# Altium PCB PCB1.PcbDoc
Units mm, origin at the board's own origin, x right, y up, seen from the top; angles counter-clockwise.
Board outline 70 x 70 mm, 4 copper layers (Top Layer, Internal Plane 1, Internal Plane 2, Bottom Layer), stack 0.462 mm thick; 11 components, 6 nets, 23 pads, 0 vias.
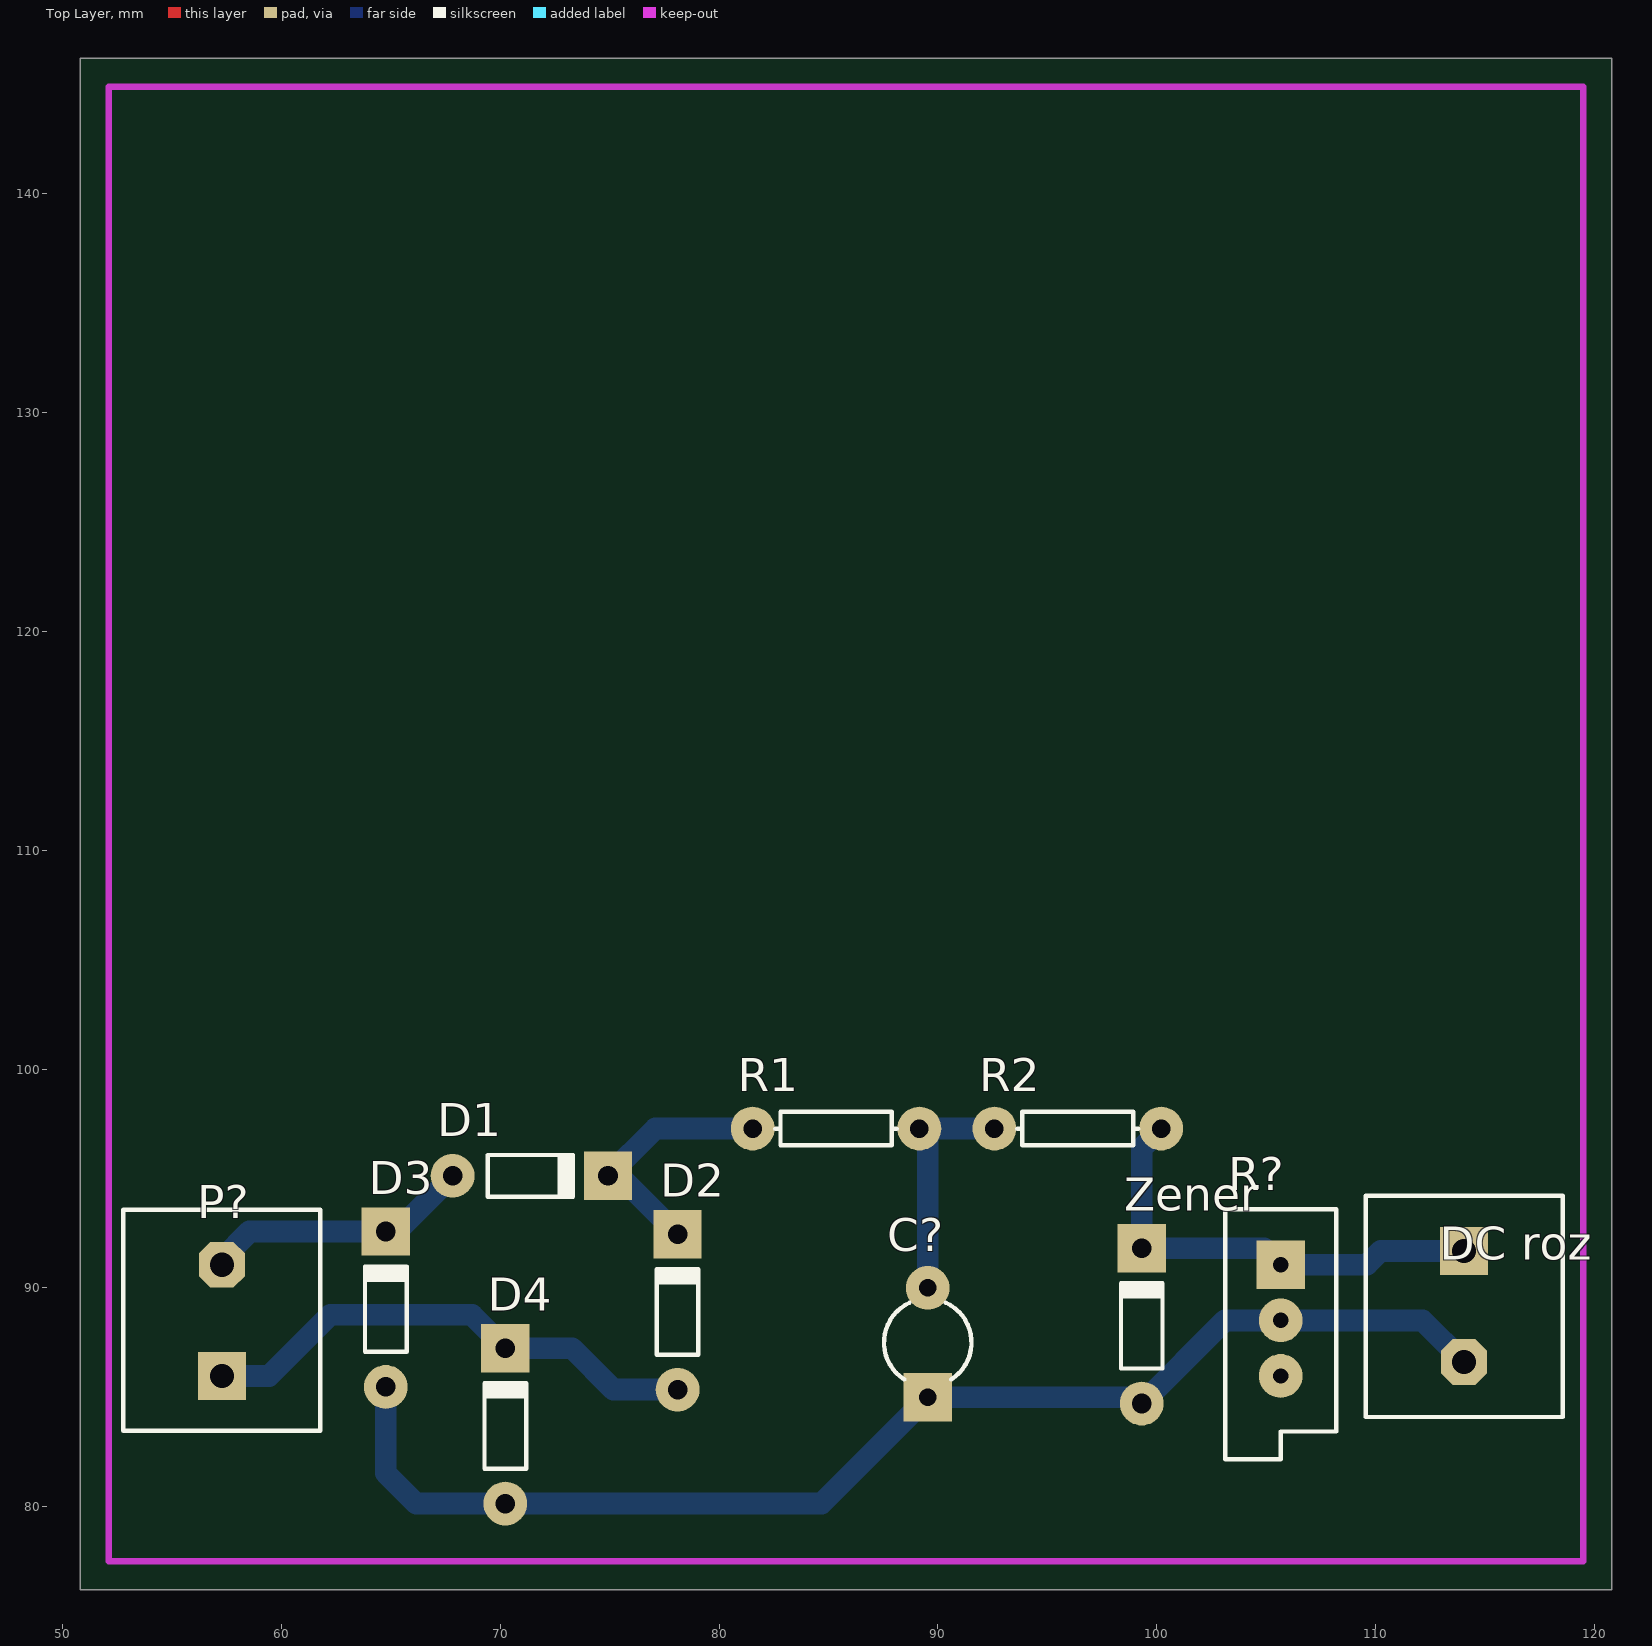
[diagram p0: Top Layer view]
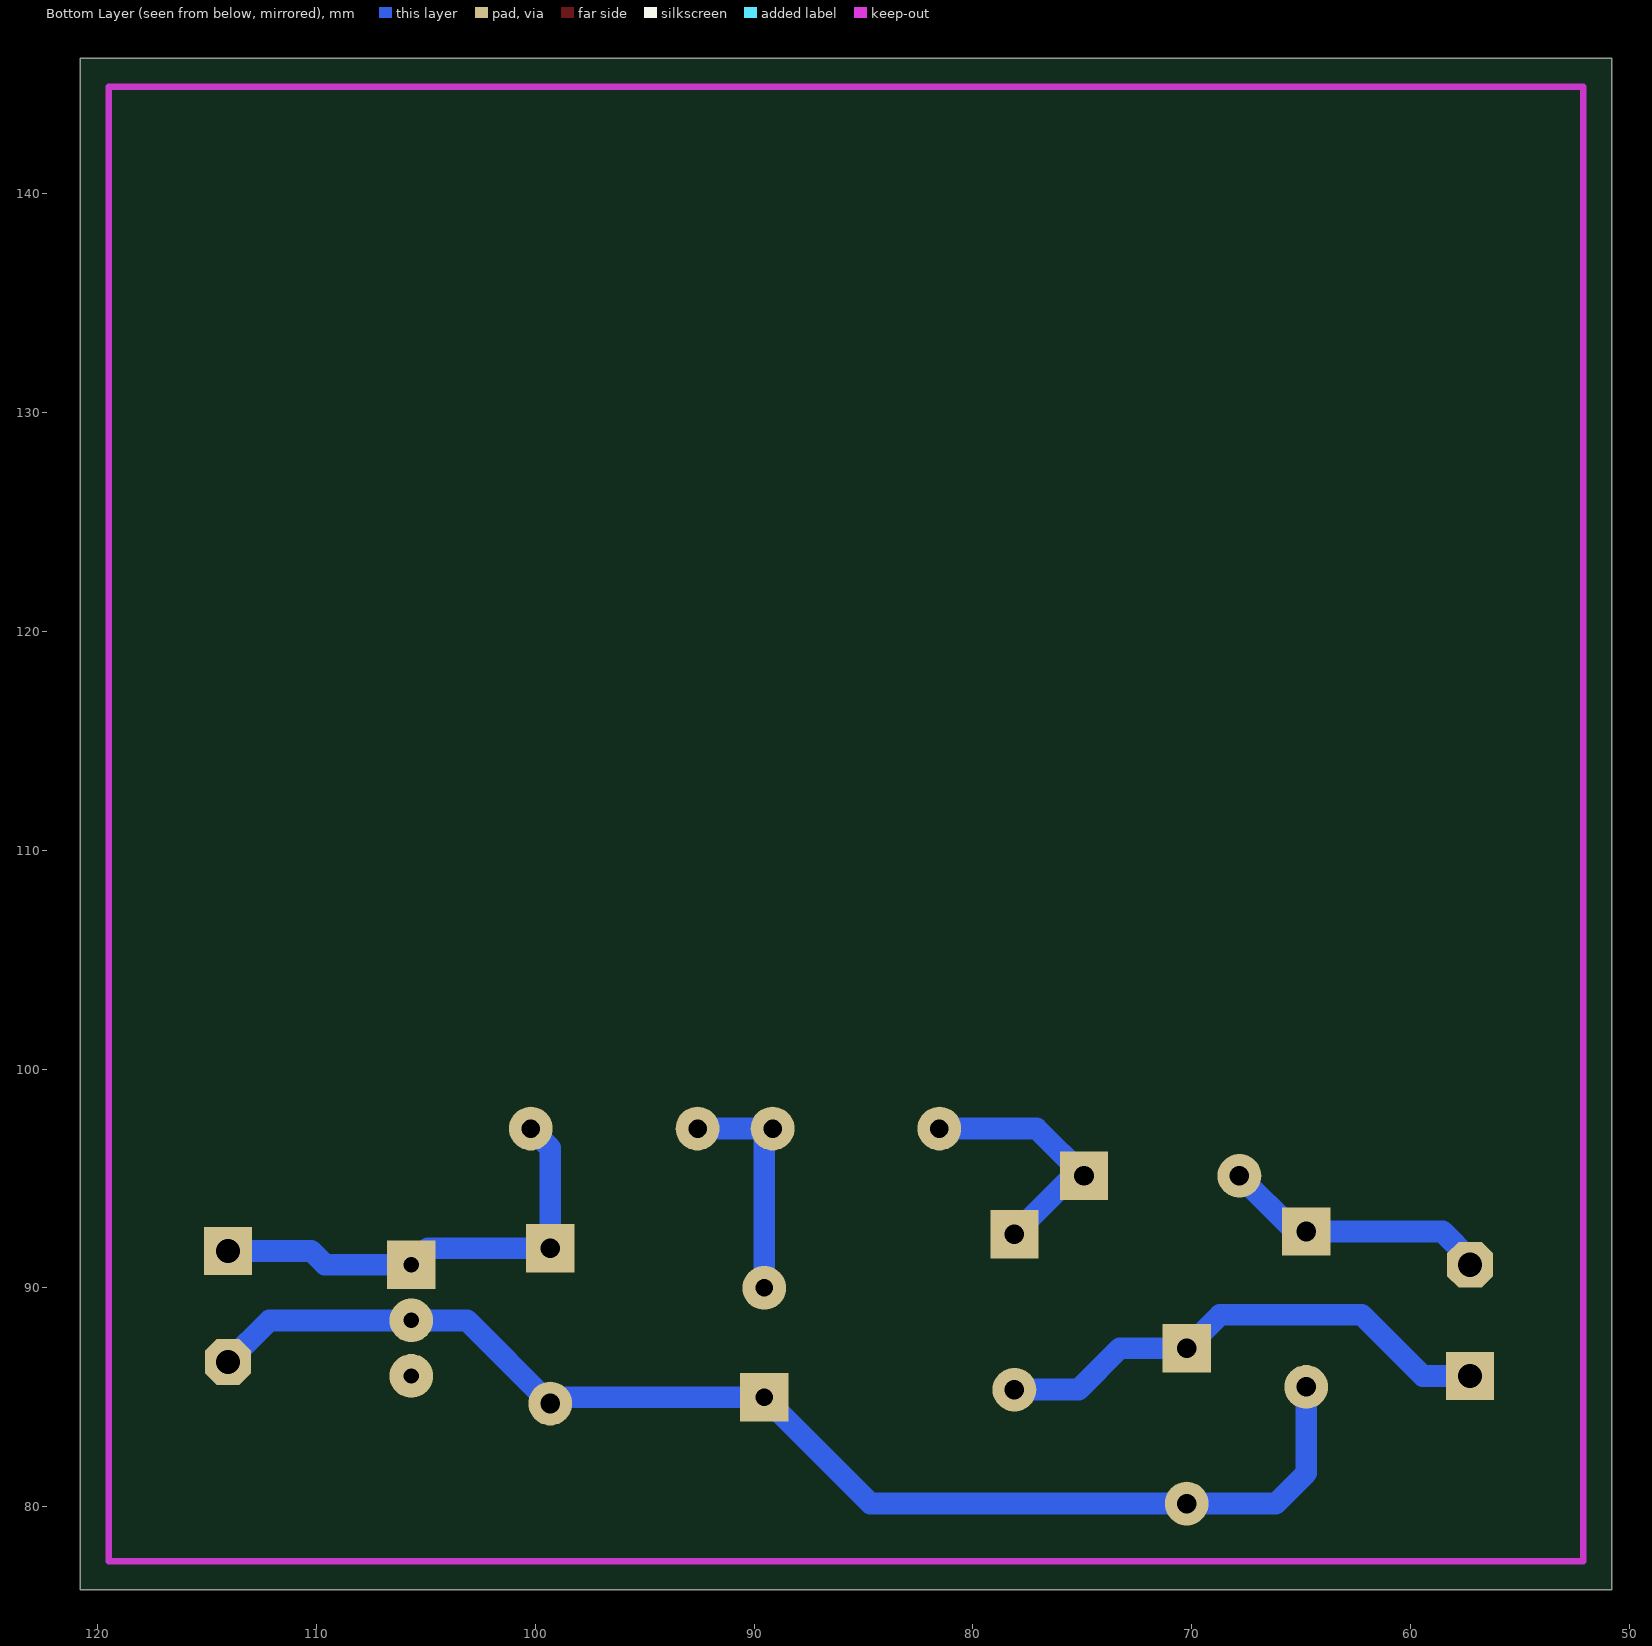
[diagram p1: Bottom Layer view, seen from below]
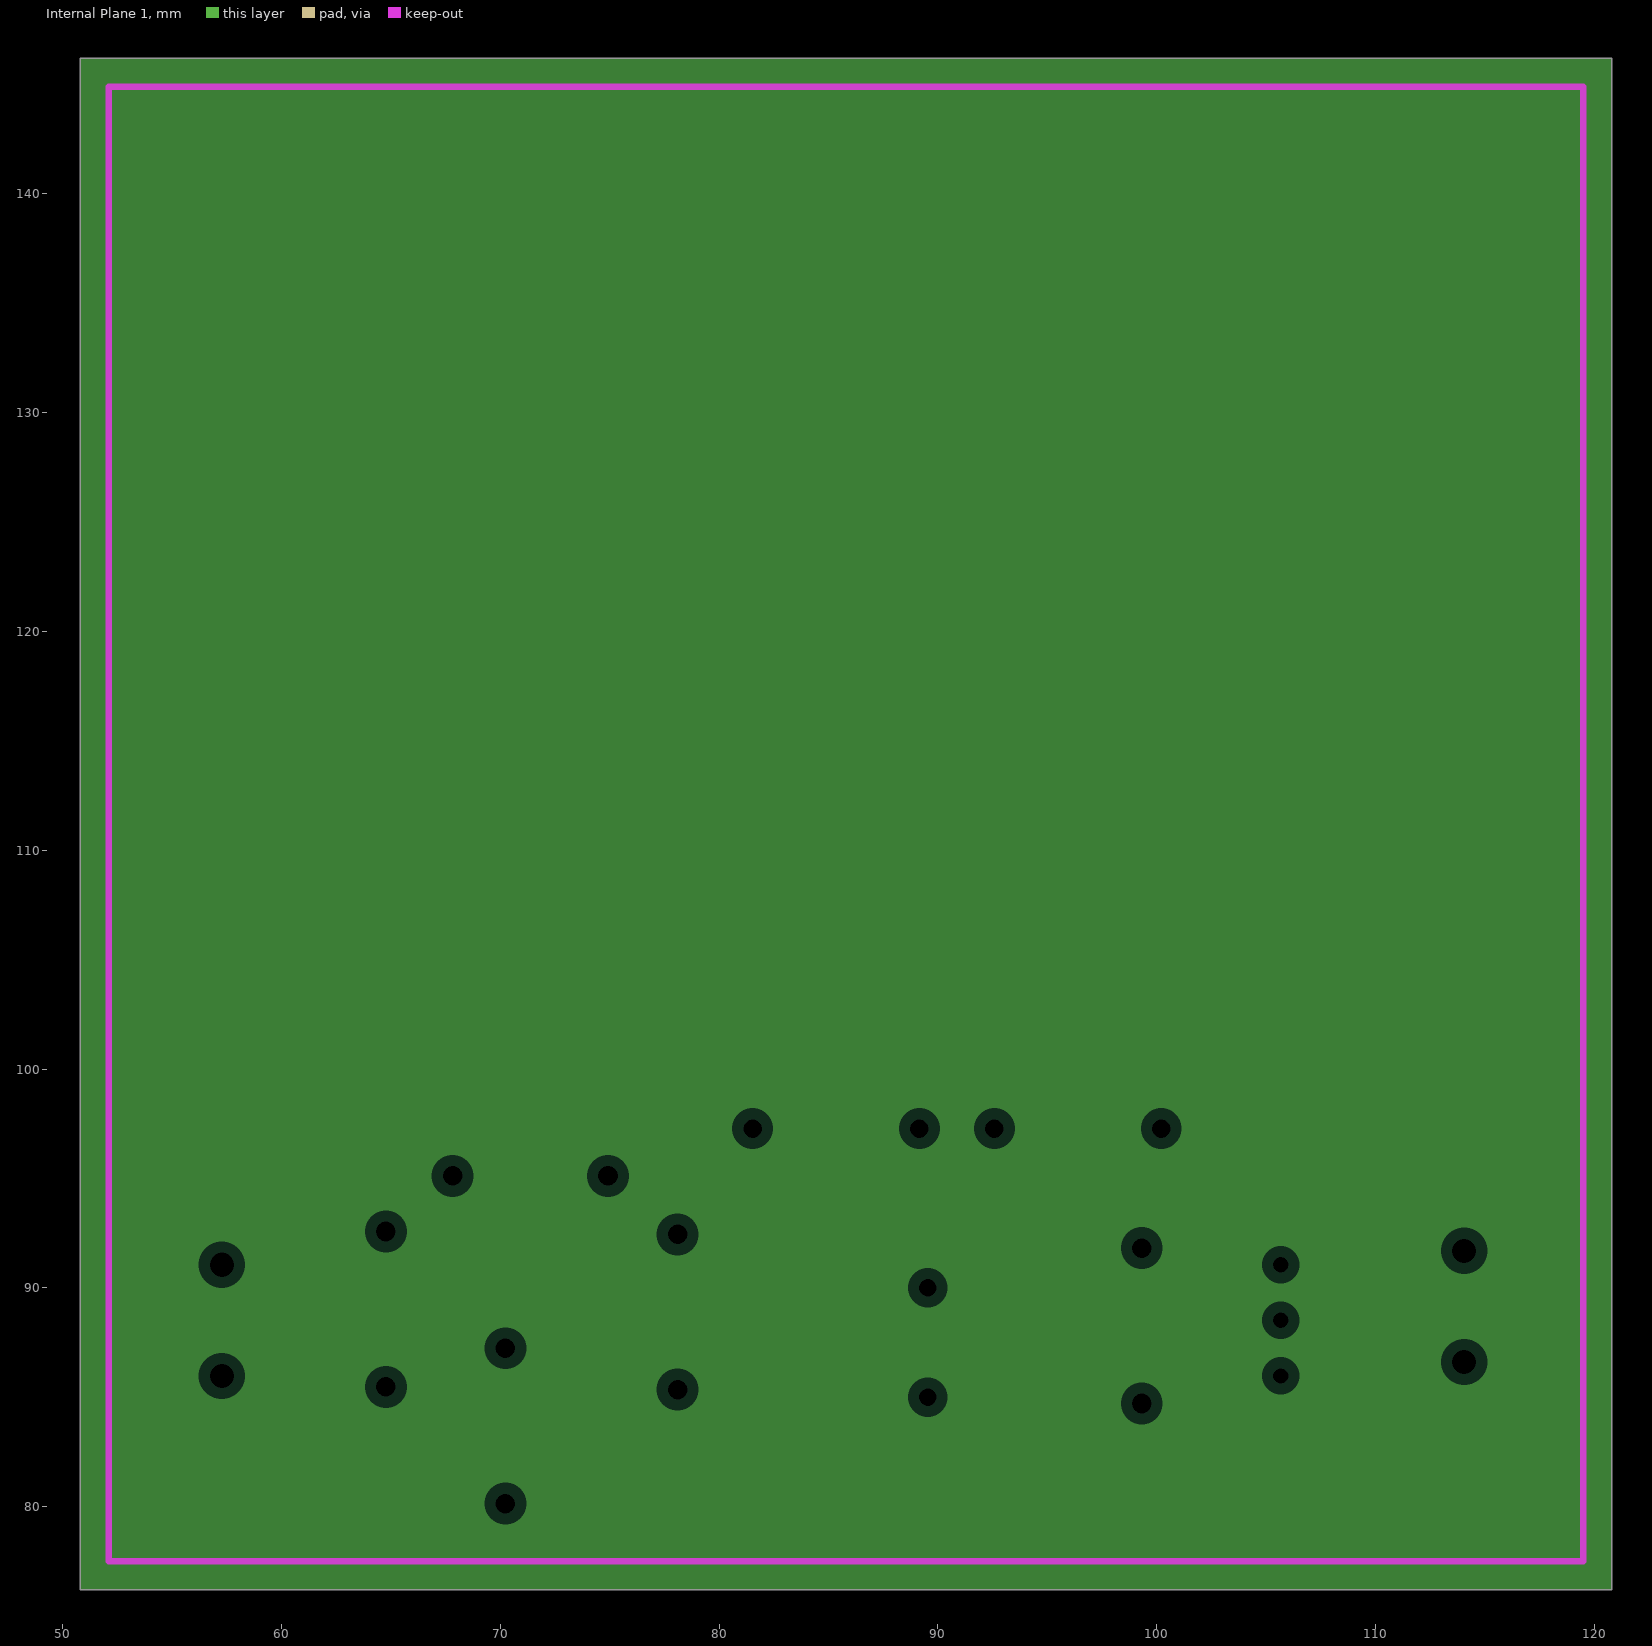
[diagram p2: Internal Plane 1, clearances drawn from the general rule]
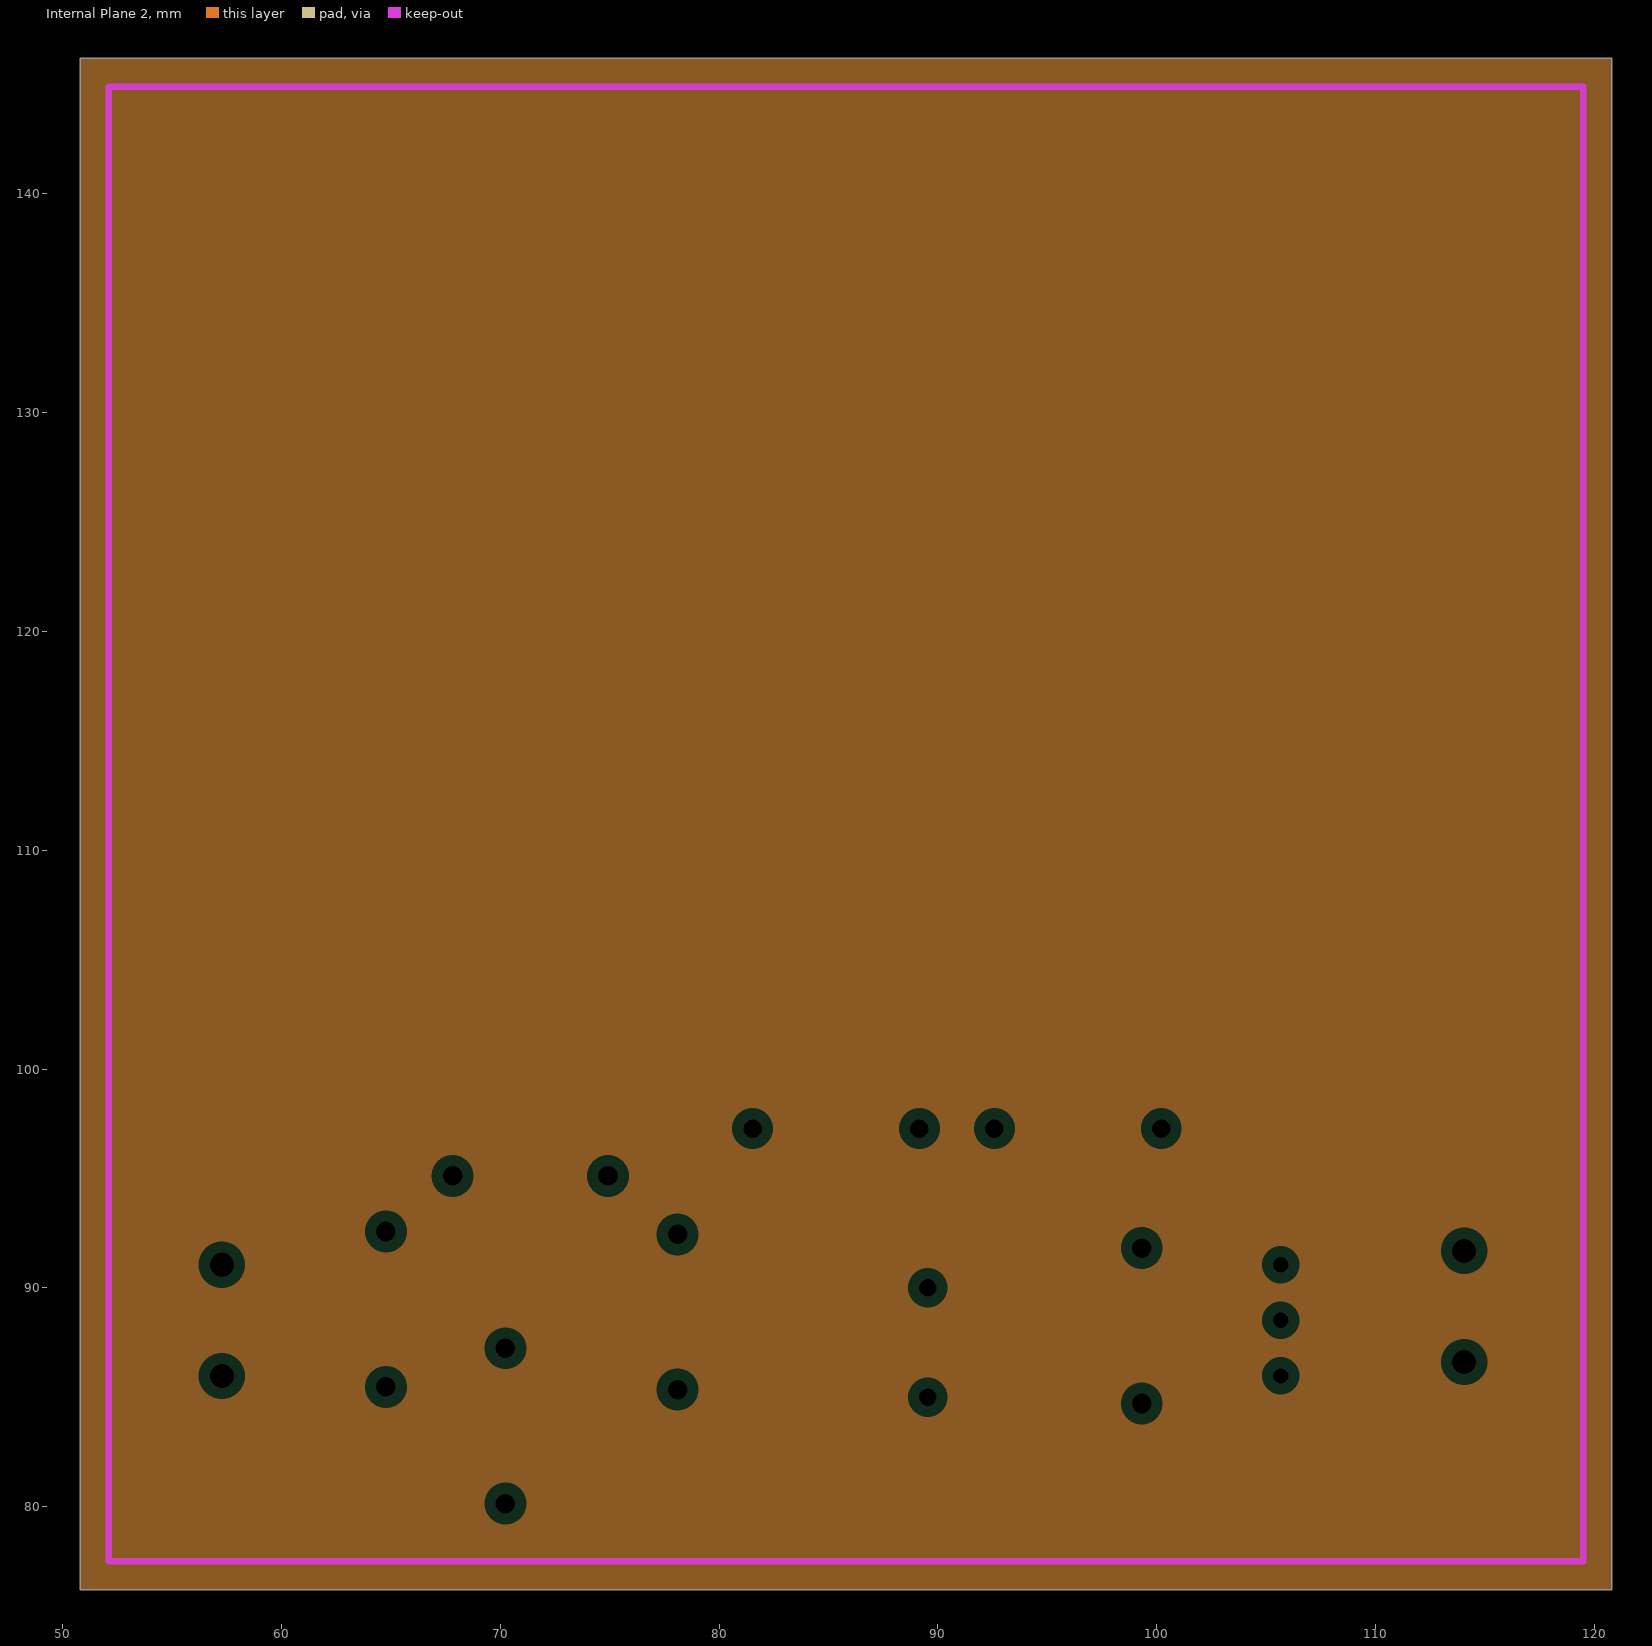
[diagram p3: Internal Plane 2, clearances drawn from the general rule]

## Layer stack, top to bottom
Top Solder: solder mask 0.0102, Solder Resist, Dk 3.5
Top Layer: signal copper 0.0356
Internal Plane 1: plane copper 0.0356
Internal Plane 2: plane copper 0.0356
Dielectric 1: dielectric 0.32, FR-4, Dk 4.8
Bottom Layer: signal copper 0.0356
Bottom Solder: solder mask 0.0102, Solder Resist, Dk 3.5

## Board outline
50.8,76.2 120.8,76.2 120.8,146.2 50.8,146.2

## Design rules (kind name [scope] priority, off if disabled: settings)
Clearance [All] p1: gap=0.8
PlaneClearance [All] p1: clearance=0.508
PlaneConnect [All] p1: planeconnectstyle=Relief reliefexpansion=0.508 reliefentries=4 reliefconductorwidth=0.254 reliefairgap=0.254
PolygonConnect [All] p1: connectstyle=Relief reliefconductorwidth=0.254 reliefentries=4 polygonreliefangle="90 Angle" airgapwidth=0.254
RoomDefinition Sheet1 [InComponentClass('Sheet1')] p1: confinementstyle=ConfineIn formatcopy=TRUE lockcomponents=FALSE outline 123.952,110.109 183.388,110.109 183.388,124.587 123.952,124.587
RoutingVias [All] p1: holewidth=0.6 width=1 viastyle="Through Hole" minholewidth=0.711 minwidth=1.27 maxholewidth=0.711 maxwidth=1.27
SolderMaskExpansion [All] p1: expansion=0.102
Width [All] p1: maxlimit=1.5 minlimit=0.8 preferedwidth=1
28 further rules are at their usual default settings.

## Components (designator, comment, footprint, x,y, rotation, side; value= is the part's Value field where it differs from the comment)
C? "Cap2" CAPR5-4X5 89.535,87.503 r90 top
D1 "Diode 1N914" DO-35 71.374,95.123 r0 top
D2 "Diode 1N914" DO-35 78.105,88.9 r90 top
D3 "Diode 1N914" DO-35 64.77,89.027 r90 top
D4 "Diode 1N914" DO-35 70.231,83.693 r90 top
"DC roz" "Header 2" "Rozeta 10A" 114.046,89.154 r270 top
P? "Header 2" "Rozeta 10A" 57.277,88.519 r90 top
R1 "Res1" AXIAL-0.3 85.344,97.282 r0 top
R2 "Res1" AXIAL-0.3 96.393,97.282 r0 top
R? "RPot" VR5 105.664,88.519 r270 top
Zener "Diode 1N914" DO-35 99.314,88.265 r90 top

## Footprints (in the part's own frame and the unit in brackets; to place one, negate y for a bottom-side part, rotate by r counter-clockwise, add the part's x,y. Pads: shape width x height; smd on the part's side, far side on the other; paste and mask are expansions set on the pad)
AXIAL-0.3 [mm] "Axial Device, Thru-Hole; 2 Leads; 0.3 in Pin Spacing"
  round 2 hole 0.85: 1(-3.81,0) 2(3.81,0)
  silkscreen extent -2.77,-0.76 2.77,0.76
CAPR5-4X5 [mm] "Capacitor; 2 Leads"
  rect 2.2x2.2 hole 0.8: 1(-2.5,0)
  round 2 hole 0.8: 2(2.5,0)
  silkscreen extent -1.69,-2 1.82,2
DO-35 [mm] "Diode, Axial; Body 3.8 x 1.9 mm (LxDia. max), Lead Dia. 0.53 mm (max)"
  round 2 hole 0.9: 1(-3.55,0)
  rect 2.2x2.2 hole 0.9: 2(3.55,0)
  silkscreen extent -1.95,-0.95 2.05,0.95
"Rozeta 10A" [mm] "connector"
  rect 2.2x2.2 hole 1.1: 1(-2.54,0)
  oct 2.1x2.1 hole 1.1: 2(2.54,0)
  silkscreen extent -5.05,-4.5 5.05,4.5, body extent -5.15,-4.6 5.15,4.6, height 13
VR5 [mm] "Thru-Hole; 3 Leads"
  rect 2.2x2.2 hole 0.7: 1(-2.54,0)
  round 2 hole 0.7: 2(0,0) 3(2.54,0)
  silkscreen extent -5.08,-2.54 6.35,2.54

## Part data
C?: "Capacitor"
D1 D2 D3 D4 Zener: "High Conductance Fast Diode"
"DC roz" P?: "Header, 2-Pin"
R1 R2: "Resistor"
R?: "Potentiometer"

## Nets (pads, with @x,y where several pads share a name; then routed paths per layer and width w, separated by ;. In a path a pad name is that pad's centre, name@x,y a point inside that pad or via, vN(x,y) a via of type N, cw(c..) or ccw(c..) an arc to the next point about the centre after c; other vN are vias at no path point)
GROUND: "DC roz.2" C?.1 D3.1 D4.1 R?.2 Zener.1 | length 58.3
  Bottom Layer w0.8: Zener.1@99.026,85.003 Zener.1
  Bottom Layer w1: D3.1 64.77,81.534 66.161,80.143 D4.1 84.675,80.143 C?.1 Zener.1@99.026,85.003 ; Zener.1 103.118,88.519 R?.2 112.141,88.519 114.046,86.614
NetC?_2: C?.2 R1.2 R2.1 | length 10.9
  Bottom Layer w0.8: R1.2 R1.2@89.535,96.901
  Bottom Layer w1: R1.2 R2.1 ; C?.2 R1.2@89.535,96.901
NetD1_1: D1.1 D3.2 P?.2 | length 12.4
  Bottom Layer w0.8: P?.2 P?.2@57.277,91.313 ; D3.2 D3.2@65.278,92.577
  Bottom Layer w1: P?.2@57.277,91.313 58.541,92.577 D3.2 ; D3.2@65.278,92.577 D1.1
NetD1_2: D1.2 D2.2 R1.1 | length 12.2
  Bottom Layer w0.8: R1.1@81.28,97.028 R1.1
  Bottom Layer w1: D2.2 75.432,95.123 D1.2 77.083,97.282 R1.1
NetD2_1: D2.1 D4.2 P?.1 | length 23.6
  Bottom Layer w0.8: P?.1 P?.1@57.404,85.852
  Bottom Layer w1: P?.1 59.436,85.979 62.23,88.773 68.701,88.773 D4.2 73.285,87.243 75.178,85.35 D2.1
"NetDC roz_1": "DC roz.1" R2.2 R?.1 Zener.2 | length 21.1
  Bottom Layer w1: R2.2 99.314,96.393 Zener.2 104.908,91.815 R?.1 109.601,91.059 110.236,91.694 114.046,91.694
pads on no net: R?.3

## Keep-outs
Keep-Out Layer:
  lines w0.3: 52.1,77.5 52.1,144.9 119.5,144.9 119.5,77.5 52.1,77.5

## Silkscreen, mask and mechanical layers (free items; w line width, h text height)
Drill Drawing:
  text ".LEGEND" at 127.912,113.665 h1.52
  text "Drill Drawing." at 127.912,111.125 h1.52

## Dimensions
52.1,77.5 to 52.1,144.9 on Mechanical 1
52.1,77.5 to 119.5,77.5 on Mechanical 1